# EAGLE board Project_v17b (EAGLE 5.06)
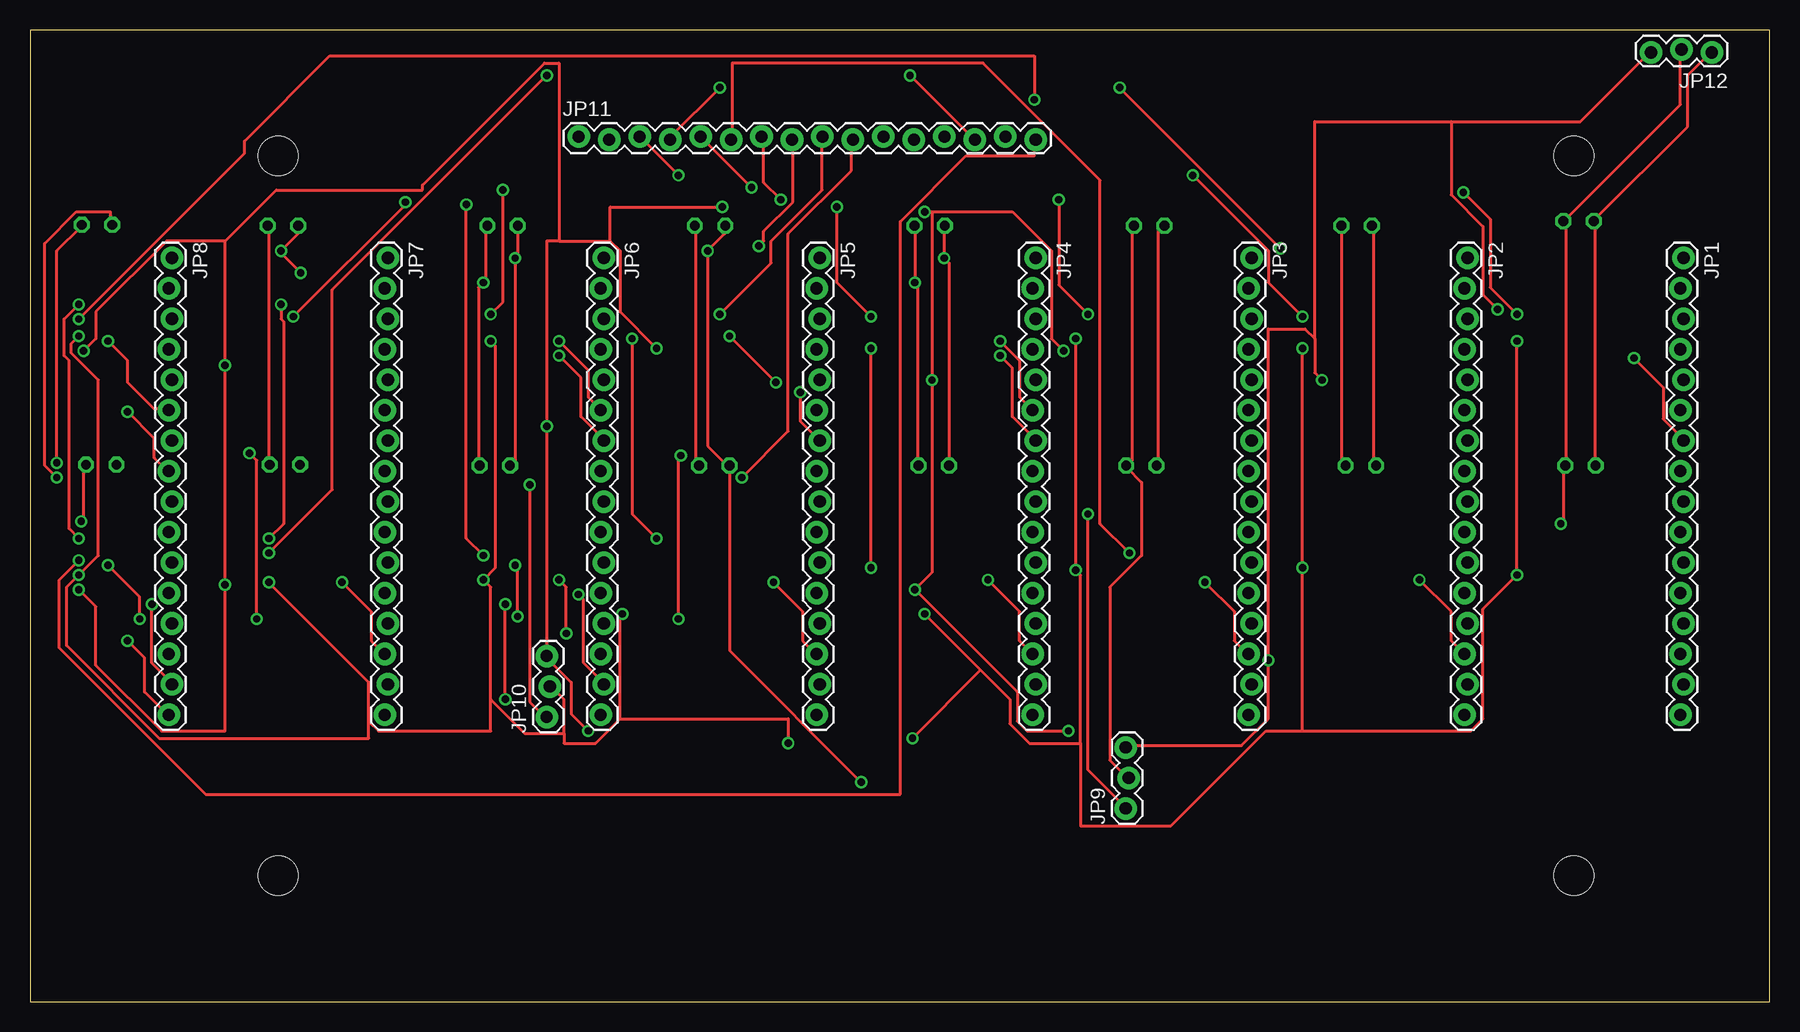
[diagram p0: board, top side]
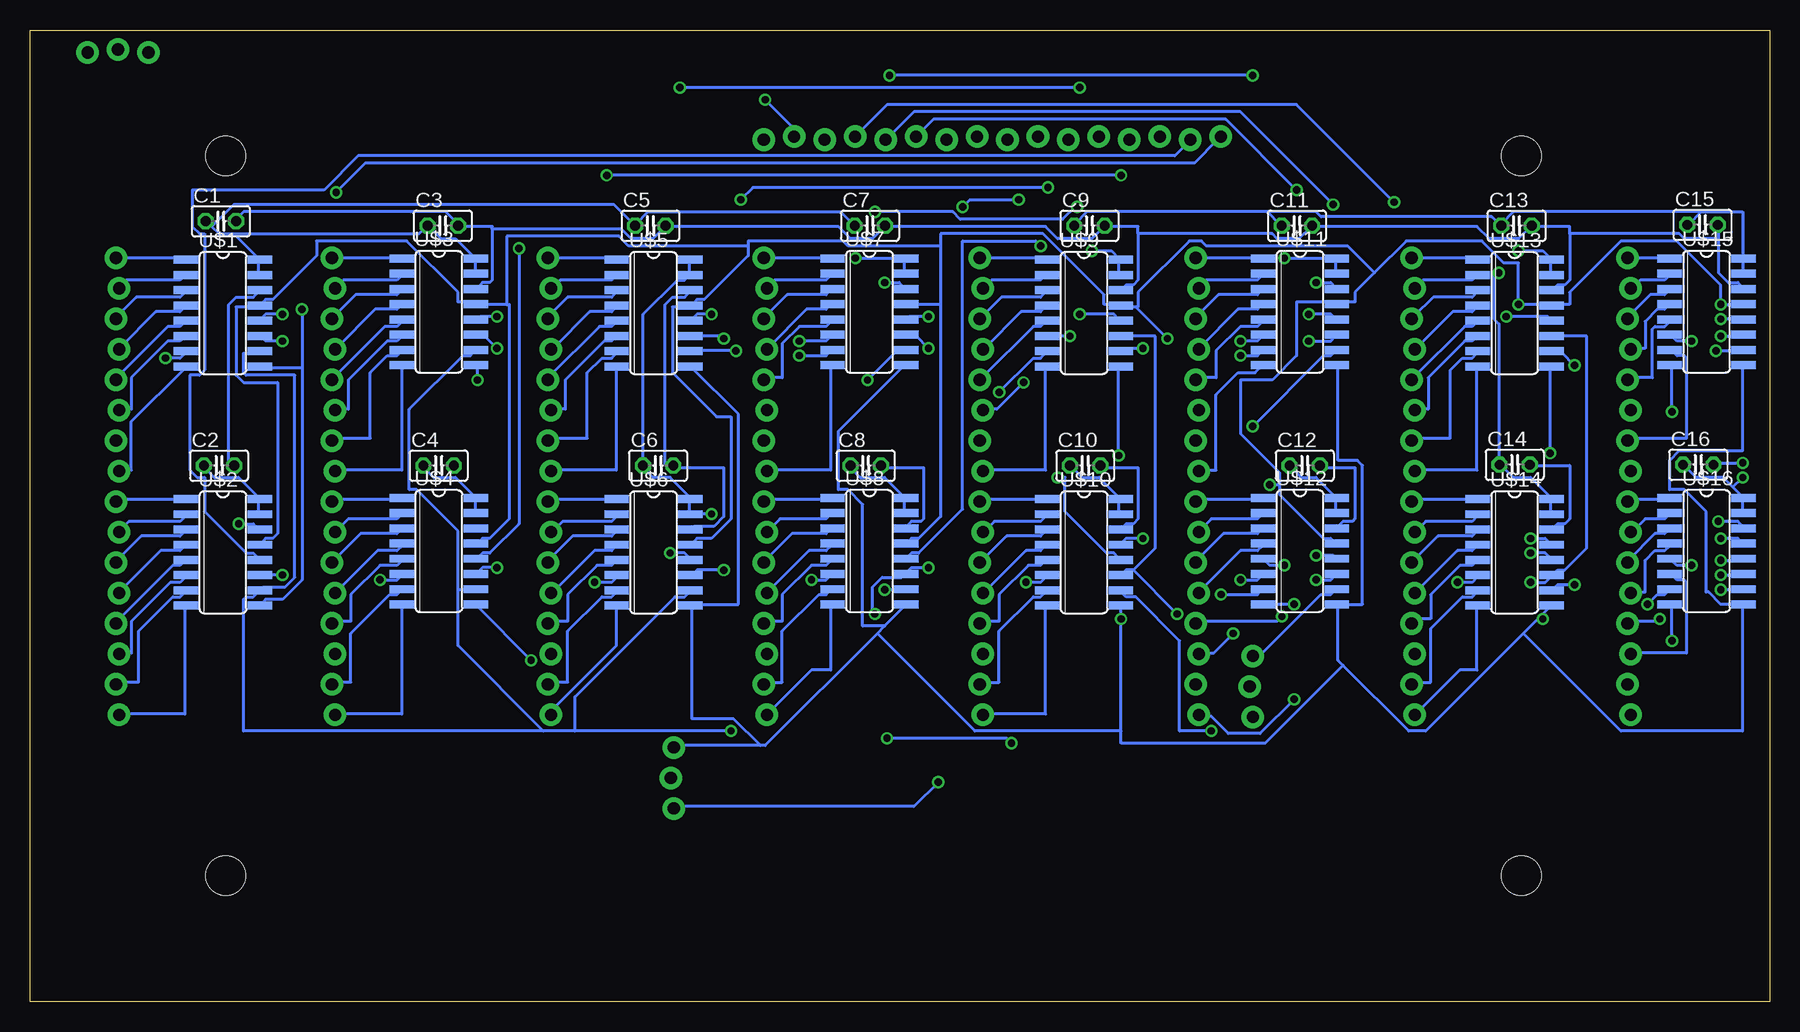
[diagram p1: board, bottom side, seen from below]

Size 145 x 81 mm. Coordinates in mm from the lower left corner, seen from the top.
Outline: 0,0 145,0 145,81 0,81 0,0
Copper layers (1*16): Top 0.035mm / dielectric 1.5mm / Bottom 0.035mm
Design rules "default": minimum track width 10mil, minimum drill 24mil, track to track 8mil, track to pad 8mil, pad to pad 8mil, via to via 8mil, smd to smd 8mil, copper to edge 40mil, drill to drill 8mil, minimum pad ring 10mil, minimum via ring 8mil, stop-mask expansion 4mil, vias tented up to drill 0mil, thermal gap 10mil

## Footprints (pad centres in the part's own frame; a part is rotated, then mirrored left to right if it is on the bottom)
C025-025X050 = drill 0.813 octagon: 1 -1.27,0; 2 1.27,0
1X16_LOCK = drill 1.016 pad 1.88 round: 1 0,0.127; 2 2.54,-0.127; 3 5.08,0.127; 4 7.62,-0.127; 5 10.16,0.127; 6 12.7,-0.127; 7 15.24,0.127; 8 17.78,-0.127; 9 20.32,0.127; 10 22.86,-0.127; 11 25.4,0.127; 12 27.94,-0.127; 13 30.48,0.127; 14 33.02,-0.127; 15 35.56,0.127; 16 38.1,-0.127
1X03_LOCK = drill 1.016 pad 1.88 round: 1 0,0.127; 2 2.54,-0.127; 3 5.08,0.127
SOIC-16 = smd 0.66 x 2.032: 1 -4.445,-3.073; 2 -3.175,-3.073; 3 -1.905,-3.073; 4 -0.635,-3.073; 5 0.635,-3.073; 6 1.905,-3.073; 7 3.175,-3.073; 8 4.445,-3.073; 9 4.445,3.073; 10 3.175,3.073; 11 1.905,3.073; 12 0.635,3.073; 13 -0.635,3.073; 14 -1.905,3.073; 15 -3.175,3.073; 16 -4.445,3.073
STAND-OFF = hole 3.302: 0,0

## Placement (x,y rotation side)
C1  [C025-025X050]  129.09,65.06 0 bottom
C2  [C025-025X050]  129.24,44.68 0 bottom
C3  [C025-025X050]  110.59,64.68 0 bottom
C4  [C025-025X050]  110.94,44.68 0 bottom
C5  [C025-025X050]  93.29,64.68 0 bottom
C6  [C025-025X050]  92.64,44.68 0 bottom
C7  [C025-025X050]  74.99,64.68 0 bottom
C8  [C025-025X050]  75.34,44.68 0 bottom
C9  [C025-025X050]  56.69,64.68 0 bottom
C10  [C025-025X050]  57.04,44.68 0 bottom
C11  [C025-025X050]  39.39,64.68 0 bottom
C12  [C025-025X050]  38.74,44.68 0 bottom
C13  [C025-025X050]  21.09,64.68 0 bottom
C14  [C025-025X050]  21.24,44.76 0 bottom
C15  [C025-025X050]  5.59,64.76 0 bottom
C16  [C025-025X050]  5.94,44.76 0 bottom
JP1  M16LOCK  [1X16_LOCK]  137.7,62 270 top
JP2  M16LOCK  [1X16_LOCK]  119.7,62 270 top
JP3  M16LOCK  [1X16_LOCK]  101.7,62 270 top
JP4  M16LOCK  [1X16_LOCK]  83.7,62 270 top
JP5  M16LOCK  [1X16_LOCK]  65.7,62 270 top
JP6  M16LOCK  [1X16_LOCK]  47.7,62 270 top
JP7  M16LOCK  [1X16_LOCK]  29.7,62 270 top
JP8  M16LOCK  [1X16_LOCK]  11.7,62 270 top
JP9  [1X03_LOCK]  91.46,16.1 90 top
JP10  [1X03_LOCK]  43.2,23.72 90 top
JP11  M16LOCK  [1X16_LOCK]  45.74,71.98 0 top
JP12  [1X03_LOCK]  140.2,79.25 180 top
U$1  MCP3208SOIC-16  [SOIC-16]  128.92,57.4 270 bottom
U$2  MCP3208SOIC-16  [SOIC-16]  128.92,37.45 270 bottom
U$3  MCP3208SOIC-16  [SOIC-16]  110.92,57.5 270 bottom
U$4  MCP3208SOIC-16  [SOIC-16]  110.92,37.55 270 bottom
U$5  MCP3208SOIC-16  [SOIC-16]  93.03,57.4 270 bottom
U$6  MCP3208SOIC-16  [SOIC-16]  93.03,37.45 270 bottom
U$7  MCP3208SOIC-16  [SOIC-16]  75.03,57.5 270 bottom
U$8  MCP3208SOIC-16  [SOIC-16]  75.03,37.55 270 bottom
U$9  MCP3208SOIC-16  [SOIC-16]  57.14,57.4 270 bottom
U$10  MCP3208SOIC-16  [SOIC-16]  57.14,37.45 270 bottom
U$11  MCP3208SOIC-16  [SOIC-16]  39.14,57.5 270 bottom
U$12  MCP3208SOIC-16  [SOIC-16]  39.14,37.55 270 bottom
U$13  MCP3208SOIC-16  [SOIC-16]  21.25,57.4 270 bottom
U$14  MCP3208SOIC-16  [SOIC-16]  21.25,37.45 270 bottom
U$15  MCP3208SOIC-16  [SOIC-16]  5.25,57.5 270 bottom
U$16  MCP3208SOIC-16  [SOIC-16]  5.25,37.55 270 bottom
U$18  [STAND-OFF]  128.7,70.5 0 top
U$19  [STAND-OFF]  128.7,10.5 0 top
U$20  [STAND-OFF]  20.7,10.5 0 top
U$21  [STAND-OFF]  20.7,70.5 0 top

## Library data of the parts
C1-C16 = resistor
JP1-JP12 U$18-U$21 = SparkFun
U$1-U$16 = MCP3208

## Nets
5V: C1.1 C2.1 C3.1 C4.1 C5.1 C6.1 C7.1 C8.1 C9.1 C10.1 C11.1 C12.1 C13.1 C14.1 C15.1 C16.1 JP9.1 JP12.1 U$1.15 U$1.16 U$2.15 U$2.16 U$3.15 U$3.16 U$4.15 U$4.16 U$5.15 U$5.16 U$6.15 U$6.16 U$7.15 U$7.16 U$8.15 U$8.16 U$9.15 U$9.16 U$10.15 U$10.16 U$11.15 U$11.16 U$12.15 U$12.16 U$13.15 U$13.16 U$14.15 U$14.16 U$15.15 U$15.16 U$16.15 U$16.16
DGND: JP9.3 JP12.3 U$1.9 U$2.9 U$3.9 U$4.9 U$5.9 U$6.9 U$7.9 U$8.9 U$9.9 U$10.9 U$11.9 U$12.9 U$13.9 U$14.9 U$15.9 U$16.9
GND: C1.2 C2.2 C3.2 C4.2 C5.2 C6.2 C7.2 C8.2 C9.2 C10.2 C11.2 C12.2 C13.2 C14.2 C15.2 C16.2 JP9.2 JP12.2 U$1.14 U$2.14 U$3.14 U$5.14 U$6.14 U$7.14 U$8.14 U$9.14 U$10.14 U$11.14 U$12.14 U$13.14 U$14.14 U$15.14 U$16.14
N$1: JP1.1 U$1.1
N$2: JP1.2 U$1.2
N$3: JP1.3 U$1.3
N$4: JP1.5 U$1.5
N$5: JP1.4 U$1.4
N$6: JP1.6 U$1.6
N$7: JP1.7 U$1.7
N$8: JP1.8 U$1.8
N$9: JP1.9 U$2.1
N$10: JP1.10 U$2.2
N$11: JP1.11 U$2.3
N$12: JP1.12 U$2.4
N$13: JP1.13 U$2.5
N$14: JP1.14 U$2.6
N$15: JP1.15 U$2.7
N$16: JP1.16 U$2.8
N$17: JP2.1 U$3.1
N$18: JP2.2 U$3.2
N$19: JP2.3 U$3.3
N$20: JP2.4 U$3.4
N$21: JP2.5 U$3.5
N$22: JP2.6 U$3.6
N$23: JP2.7 U$3.7
N$24: JP2.8 U$3.8
N$25: JP2.9 U$4.1
N$26: JP2.10 U$4.2
N$27: JP2.11 U$4.3
N$28: JP2.12 U$4.4
N$29: JP2.13 U$4.5
N$30: JP2.14 U$4.6
N$31: JP2.15 U$4.7
N$32: JP2.16 U$4.8
N$33: JP3.1 U$5.1
N$34: JP3.2 U$5.2
N$35: JP3.3 U$5.3
N$36: JP3.4 U$5.4
N$37: JP3.5 U$5.5
N$38: JP3.6 U$5.6
N$39: JP3.7 U$5.7
N$40: JP3.8 U$5.8
N$41: JP3.9 U$6.1
N$42: JP3.10 U$6.2
N$43: JP3.11 U$6.3
N$44: JP3.12 U$6.4
N$45: JP3.13 U$6.5
N$46: JP3.14 U$6.6
N$47: JP3.15 U$6.7
N$48: JP3.16 U$6.8
N$49: JP4.1 U$7.1
N$50: JP4.2 U$7.2
N$51: JP4.3 U$7.3
N$52: JP4.4 U$7.4
N$53: JP4.5 U$7.5
N$54: JP4.6 U$7.6
N$55: JP4.7 U$7.7
N$56: JP4.8 U$7.8
N$57: JP4.9 U$8.1
N$58: JP4.10 U$8.2
N$59: JP4.11 U$8.3
N$60: JP4.12 U$8.4
N$61: JP4.13 U$8.5
N$62: JP4.14 U$8.6
N$63: JP4.15 U$8.7
N$64: JP4.16 U$8.8
N$65: JP5.1 U$9.1
N$66: JP5.2 U$9.2
N$67: JP5.3 U$9.3
N$68: JP5.4 U$9.4
N$69: JP5.5 U$9.5
N$70: JP5.6 U$9.6
N$71: JP5.7 U$9.7
N$72: JP5.8 U$9.8
N$73: JP5.9 U$10.1
N$74: JP5.10 U$10.2
N$75: JP5.11 U$10.3
N$76: JP5.12 U$10.4
N$77: JP5.13 U$10.5
N$78: JP5.14 U$10.6
N$79: JP5.15 U$10.7
N$80: JP5.16 U$10.8
N$81: JP6.1 U$11.1
N$82: JP6.2 U$11.2
N$83: JP6.3 U$11.3
N$84: JP6.4 U$11.4
N$85: JP6.5 U$11.5
N$86: JP6.6 U$11.6
N$87: JP6.7 U$11.7
N$88: JP6.8 U$11.8
N$89: JP6.9 U$12.1
N$90: JP6.10 U$12.2
N$91: JP6.11 U$12.3
N$92: JP6.12 U$12.4
N$93: JP6.13 U$12.5
N$94: JP6.14 U$12.6
N$95: JP6.15 U$12.7
N$96: JP6.16 U$12.8
N$97: JP7.1 U$13.1
N$98: JP7.2 U$13.2
N$99: JP7.3 U$13.3
N$100: JP7.4 U$13.4
N$101: JP7.5 U$13.5
N$102: JP7.6 U$13.6
N$103: JP7.7 U$13.7
N$104: JP7.8 U$13.8
N$105: JP7.9 U$14.1
N$106: JP7.10 U$14.2
N$107: JP7.11 U$14.3
N$108: JP7.12 U$14.4
N$109: JP7.13 U$14.5
N$110: JP7.14 U$14.6
N$111: JP7.15 U$14.7
N$112: JP7.16 U$14.8
N$113: JP8.1 U$15.1
N$114: JP8.2 U$15.2
N$115: JP8.3 U$15.3
N$116: JP8.4 U$15.4
N$117: JP8.5 U$15.5
N$118: JP8.6 U$15.6
N$119: JP8.7 U$15.7
N$120: JP8.8 U$15.8
N$121: JP8.9 U$16.1
N$122: JP8.10 U$16.2
N$123: JP8.11 U$16.3
N$124: JP8.12 U$16.4
N$125: JP8.13 U$16.5
N$126: JP8.14 U$16.6
N$127: JP8.15 U$16.7
N$128: JP8.16 U$16.8
N$129: JP10.1 U$1.13 U$2.13 U$3.13 U$4.13 U$5.13 U$6.13 U$7.13 U$8.13 U$9.13 U$10.13 U$11.13 U$12.13 U$13.13 U$14.13 U$15.13 U$16.13
N$130: JP10.2 U$1.11 U$2.11 U$3.11 U$4.11 U$5.11 U$6.11 U$7.11 U$8.11 U$9.11 U$10.11 U$11.11 U$12.11 U$13.11 U$14.11 U$15.11 U$16.11
N$132: JP11.8 U$8.12
N$133: JP11.16 U$16.12
N$134: JP11.15 U$15.12
N$135: JP11.7 U$7.12
N$136: JP11.6 U$6.12
N$137: JP11.14 U$14.12
N$138: JP11.5 U$5.12
N$139: JP11.13 U$13.12
N$140: JP11.4 U$4.12
N$141: JP11.12 U$12.12
N$142: JP11.3 U$3.12
N$143: JP11.11 U$11.12
N$144: JP11.10 U$10.12
N$145: JP11.2 U$2.12
N$146: JP11.1 U$1.12
N$147: JP10.3 U$1.10 U$2.10 U$3.10 U$4.10 U$5.10 U$6.10 U$7.10 U$8.10 U$9.10 U$10.10 U$11.10 U$12.10 U$13.10 U$14.10 U$15.10 U$16.10
N$148: JP11.9 U$9.12

## Tracks (layer width: path | path; a pad name or v marks a point on that pad's centre or on a via)
5V  (via drill 0.61)
  Top 0.254: C13.1 22.35,64.62 22.35,64.01 v20.93,62.59 20.93,62.38 v22.55,60.76 | v2.23,43.69 1.22,44.7 1.22,63.2 3.86,65.84 6.71,65.84 6.71,64.82 C15.1 | C9.1 57.91,64.62 57.91,64.01 v56.49,62.59 56.49,46.33 58.12,44.7 C10.1 58.32,44.5 58.32,29.26 v69.29,18.29 | C11.1 40.64,64.62 40.64,62.18 v40.44,61.98 40.44,45.11 40.03,44.7 C12.1 | C7.1 76.2,64.62 v76.2,61.98 76.61,61.57 76.61,44.7 C8.1 | C5.1 94.49,64.62 94.08,64.21 94.08,44.7 C6.1 | v88.19,40.64 88.19,19.3 91.24,16.26 JP9.1 | JP12.1 140,79.05 138.18,77.22 138.18,72.95 130.45,65.23 C1.1 130.45,65.02 130.45,44.7 C2.1 | C4.1 112.17,44.7 111.96,44.91 111.96,64.62 C3.1
  Bottom 0.254: U$16.15 2.23,40.84 2.23,41.86 U$16.16 2.23,42.06 3.05,42.88 | 3.05,42.88 3.86,43.69 6.1,43.69 7.11,44.7 C16.1 | U$14.15 18.29,40.64 18.29,41.86 U$14.16 18.29,42.06 19.91,43.69 21.34,43.69 22.35,44.7 C14.1 22.55,44.91 22.55,56.49 22.96,56.9 22.96,60.76 v22.55,60.76 | U$13.15 18.29,60.76 18.29,61.77 U$13.16 18.29,61.98 18.9,62.59 v20.93,62.59 | U$15.15 2.23,60.76 2.23,61.77 U$15.16 2.23,61.98 2.23,65.84 5.69,65.84 | 5.69,65.84 6.71,64.82 C15.1 | 5.69,65.84 21.34,65.84 22.35,64.82 C13.1 22.55,64.82 23.16,65.43 37.39,65.43 37.8,65.84 41.86,65.84 | 3.05,42.88 v2.23,43.69 | U$10.15 54.25,40.64 54.25,41.86 U$10.16 54.25,42.06 55.88,43.69 57.3,43.69 58.12,44.5 C10.1 | U$9.15 54.25,60.76 54.25,61.77 U$9.16 54.25,61.98 54.86,62.59 v56.49,62.59 | U$12.15 36.17,40.84 36.17,41.86 U$12.16 36.17,42.06 37.8,43.69 39.01,43.69 39.83,44.5 C12.1 | U$11.15 36.17,60.76 36.17,61.77 U$11.16 36.17,61.98 v40.44,61.98 | 41.86,65.84 56.9,65.84 57.91,64.82 C9.1 | 41.86,65.84 40.84,64.82 C11.1 | U$7.15 72.14,60.76 72.14,61.77 U$7.16 72.14,61.98 v76.2,61.98 | U$8.15 72.14,40.84 72.14,41.86 U$8.16 72.14,42.06 73.76,43.69 75.79,43.69 76.61,44.5 C8.1 | U$5.16 90.02,61.77 90.02,60.76 U$5.15 90.02,60.55 90.42,60.15 91.03,60.15 93.88,57.3 93.88,44.7 C6.1 93.88,44.5 93.07,43.69 91.64,43.69 90.02,42.06 U$6.16 90.02,41.86 90.02,40.64 U$6.15 89.81,40.64 v88.19,40.64 | C7.1 76.4,64.82 77.42,65.84 93.47,65.84 94.49,64.82 C5.1 94.69,64.82 96.32,66.45 128.02,66.45 129.84,64.62 | U$2.15 125.98,40.64 125.98,41.86 U$2.16 125.98,42.06 127.61,43.69 129.64,43.69 130.45,44.5 C2.1 | U$4.15 107.9,40.84 107.9,41.86 U$4.16 107.9,42.06 109.53,43.69 111.35,43.69 112.17,44.5 C4.1
  Bottom 0.254: U$3.15 107.9,60.76 107.9,61.77 U$3.16 107.9,61.98 109.53,63.6 110.74,63.6 111.76,64.62 C3.1 111.96,64.62 112.57,64.01 128.02,64.01 | U$1.15 125.98,60.76 125.98,61.77 U$1.16 125.98,61.98 128.02,64.01 | 128.02,64.01 129.24,64.01 129.84,64.62 | 129.84,64.62 130.25,65.02 C1.1 | v69.29,18.29 71.32,16.26 91.24,16.26 JP9.1
DGND  (via drill 0.61)
  Top 0.254: v18.29,45.72 18.9,45.11 v18.9,31.9 | v54.25,45.52 54.05,45.31 v54.05,31.9 | JP9.3 91.44,21.34 100.99,21.34 103.23,23.57 v103.23,28.45 103.23,56.08 106.27,56.08 107.09,55.27 | v107.7,51.82 107.09,52.43 107.09,55.27 | 118.47,73.36 107.09,73.36 107.09,55.27 | 118.47,73.36 129.24,73.36 134.93,79.05 JP12.3 | v122.33,57.71 121.11,58.93 121.11,64.62 118.47,67.26 118.47,73.36
  Bottom 0.254: 20.52,30.68 28.65,22.55 30.07,22.55 35.56,28.04 | 20.52,30.68 19.1,32.11 | 19.1,32.11 18.29,32.92 U$14.9 | 35.56,28.04 35.97,28.45 35.97,32.92 U$12.9 35.97,33.12 33.93,33.12 33.93,44.7 34.34,45.11 35.97,45.11 35.97,53.03 U$11.9 | 54.05,22.55 54.05,21.54 42.06,21.54 35.56,28.04 | 54.05,22.55 v54.05,31.9 54.05,32.92 U$10.9 | 20.52,30.68 12.39,22.55 2.23,22.55 2.23,32.92 U$16.9 2.23,33.12 4.06,33.12 5.08,34.14 5.28,34.14 5.28,40.84 7.11,42.67 8.33,42.67 8.33,45.11 7.52,45.92 2.23,45.92 2.23,53.03 U$15.9 | v18.29,45.72 18.29,52.83 U$13.9 | 19.1,32.11 v18.9,31.9 | v54.25,45.52 54.25,52.83 U$9.9 | 122.33,52.83 122.33,35.15 123.95,33.53 125.37,33.53 125.78,33.12 U$2.9 | 122.33,52.83 125.78,52.83 U$1.9 | 74.37,30.68 83.72,21.34 84.12,21.34 | 74.37,30.68 73.76,31.29 | 73.76,31.29 72.14,32.92 U$8.9 | 84.12,21.34 91.24,21.34 JP9.3 | 84.12,21.34 86.36,23.57 89.81,23.57 89.81,32.92 U$6.9 89.81,33.12 85.95,33.12 85.95,48.97 89.81,52.83 U$5.9 | v103.23,28.45 107.7,32.92 U$4.9 | 73.76,31.29 75.59,31.29 75.59,41.45 76.81,42.67 77.62,42.67 77.62,47.55 72.14,53.03 U$7.9 | v107.7,51.82 107.7,53.03 U$3.9 | v122.33,57.71 122.33,52.83 | 54.05,22.55 66.24,22.55 74.37,30.68
GND  (via drill 0.61)
  Top 0.254: v4.27,40.03 4.47,40.23 4.47,44.7 C16.2 | C14.2 19.91,44.91 19.91,64.62 C13.2 | v2.23,44.91 2.23,62.59 4.27,64.62 C15.2 | C11.2 38,64.62 38,60.15 v37.8,59.94 37.39,59.54 37.39,44.7 C12.2 | C10.2 55.68,44.7 55.47,44.91 55.47,64.62 C9.2 | v127.61,39.83 127.81,40.03 127.81,44.5 C2.2 128.02,44.7 128.02,65.02 C1.2 128.02,65.23 137.57,74.78 137.57,79.25 JP12.2 | JP9.2 91.44,18.69 90.02,20.12 90.02,34.54 92.66,37.19 92.66,43.28 91.44,44.5 C6.2 91.44,44.7 91.85,45.11 91.85,64.62 C5.2 | C7.2 73.76,64.62 v73.76,59.94 73.97,59.74 73.97,44.7 C8.2 | C4.2 109.53,44.7 109.32,44.91 109.32,64.62 C3.2
  Bottom 0.254: v4.27,40.03 2.64,40.03 2.23,39.62 U$16.14 | U$14.14 18.09,39.42 17.68,39.83 17.07,39.83 16.66,40.23 16.66,44.7 19.91,44.7 C14.2 | 16.66,64.01 16.66,64.62 19.71,64.62 C13.2 19.91,64.62 20.93,63.6 23.37,63.6 24.38,64.62 38,64.62 C11.2 38.2,64.62 39.22,63.6 41.05,63.6 41.45,64.01 52.63,64.01 | 16.66,64.01 16.66,60.15 17.07,59.74 17.68,59.74 18.09,59.33 U$13.14 | 4.27,63.6 4.27,64.62 C15.2 | 4.27,63.6 4.27,60.76 3.45,59.94 2.64,59.94 2.23,59.54 U$15.14 | 16.66,64.01 7.52,64.01 7.11,63.6 4.27,63.6 | v2.23,44.91 4.47,44.91 C16.2 | U$10.14 54.05,39.42 53.65,39.83 53.03,39.83 52.63,40.23 52.63,44.5 55.68,44.5 C10.2 | 52.63,64.01 52.63,64.62 55.27,64.62 C9.2 55.47,64.62 56.49,63.6 59.33,63.6 60.35,64.62 73.56,64.62 C7.2 73.76,64.62 74.78,63.6 76.61,63.6 77.62,64.62 91.85,64.62 C5.2 92.05,64.62 93.07,63.6 94.89,63.6 95.71,64.41 106.48,64.41 | 52.63,64.01 52.63,60.15 53.03,59.74 53.65,59.74 54.05,59.33 U$9.14 | U$12.14 35.97,39.62 35.56,40.03 34.75,40.03 34.54,40.23 34.54,44.5 37.39,44.5 C12.2 | v37.8,59.94 36.58,59.94 36.17,59.54 U$11.14 | v127.61,39.83 126.39,39.83 125.98,39.42 U$2.14 | U$1.14 125.98,59.13 126.39,58.73 127.81,58.73 128.42,58.12 128.42,44.7 128.02,44.7 C2.2 | U$6.14 89.81,39.42 89.61,39.62 87.99,39.62 87.17,40.44 87.17,44.5 91.24,44.5 C6.2 91.44,44.7 92.05,44.7 92.05,58.12 91.44,58.73 90.42,58.73 90.02,59.13 U$5.14 | v73.76,59.94 72.54,59.94 72.14,59.54 U$7.14 | U$8.14 71.93,39.62 71.53,40.03 70.71,40.03 70.51,40.23 70.51,44.5 73.97,44.5 C8.2 | 106.48,64.41 106.48,64.62 109.12,64.62 C3.2 109.32,64.82 110.34,65.84 127.2,65.84 127.81,65.23 C1.2
  Bottom 0.254: 106.48,64.41 106.48,60.15 106.68,59.94 107.29,59.94 107.7,59.54 U$3.14
N$1
  Bottom 0.254: U$1.1 132.08,61.98 137.77,61.98 JP1.1
N$2
  Bottom 0.254: U$1.2 132.08,60.55 132.49,60.15 136.96,60.15 137.57,59.54 JP1.2
N$3
  Bottom 0.254: U$1.3 132.08,59.13 132.49,58.73 136.14,58.73 137.77,57.1 JP1.3
N$4
  Bottom 0.254: U$1.5 132.08,56.69 132.49,56.29 133.5,56.29 137.77,52.02 JP1.5
N$5
  Bottom 0.254: U$1.4 132.08,57.91 132.49,57.51 134.52,57.51 137.57,54.46 JP1.4
N$6
  Bottom 0.254: U$1.6 132.08,55.47 132.49,55.07 133.5,55.07 136.55,52.02 136.55,49.38 137.57,49.38 JP1.6
N$7  (via drill 0.61)
  Top 0.254: v133.71,53.65 136.14,51.21 136.14,48.56 137.77,46.94 JP1.7
  Bottom 0.254: v133.71,53.65 132.49,53.65 132.08,54.05 U$1.7
N$8
  Bottom 0.254: U$1.8 132.08,52.83 136.55,48.36 136.55,44.3 137.57,44.3 JP1.8
N$9
  Bottom 0.254: U$2.1 132.08,41.86 137.77,41.86 JP1.9
N$10
  Bottom 0.254: U$2.2 132.08,40.44 132.49,40.03 136.75,40.03 137.57,39.22 JP1.10
N$11
  Bottom 0.254: U$2.3 132.08,39.22 132.49,38.81 135.74,38.81 137.77,36.78 JP1.11
N$12
  Bottom 0.254: U$2.4 132.49,37.59 134.11,37.59 137.57,34.14 JP1.12
N$13
  Bottom 0.254: U$2.5 132.08,36.78 132.49,36.37 133.1,36.37 137.77,31.7 JP1.13
N$14
  Bottom 0.254: U$2.6 132.08,35.36 132.49,34.95 133.3,34.95 136.55,31.7 136.55,29.06 137.57,29.06 JP1.14
N$15
  Bottom 0.254: U$2.7 132.08,34.14 132.49,33.73 133.1,33.73 135.94,30.89 135.94,26.62 137.77,26.62 JP1.15
N$16
  Bottom 0.254: U$2.8 132.08,32.92 132.08,23.98 137.57,23.98 JP1.16
N$17
  Bottom 0.254: U$3.1 114,61.98 119.69,61.98 JP2.1
N$18
  Bottom 0.254: U$3.2 114,60.55 114.4,60.15 118.87,60.15 119.48,59.54 JP2.2
N$19
  Bottom 0.254: U$3.3 114,59.33 114.4,58.93 117.86,58.93 119.69,57.1 JP2.3
N$20
  Bottom 0.254: U$3.4 114,58.12 114.4,57.71 116.23,57.71 119.48,54.46 JP2.4
N$21
  Bottom 0.254: U$3.5 114,56.69 114.4,56.29 115.42,56.29 119.69,52.02 JP2.5
N$22
  Bottom 0.254: U$3.6 114,55.47 114.4,55.07 115.21,55.07 118.47,51.82 118.47,49.38 119.48,49.38 JP2.6
N$23
  Bottom 0.254: U$3.7 114,54.25 114.4,53.85 115.21,53.85 116.64,52.43 116.64,46.94 119.69,46.94 JP2.7
N$24
  Bottom 0.254: U$3.8 114,53.03 114,44.3 119.48,44.3 JP2.8
N$25
  Bottom 0.254: U$4.1 114,41.86 119.69,41.86 JP2.9
N$26
  Bottom 0.254: U$4.2 114,40.64 114.4,40.23 118.47,40.23 119.48,39.22 JP2.10
N$27
  Bottom 0.254: U$4.3 114,39.42 114.4,39.01 117.45,39.01 119.69,36.78 JP2.11
N$28
  Bottom 0.254: U$4.4 114,38 114.4,37.59 116.03,37.59 119.48,34.14 JP2.12
N$29
  Bottom 0.254: U$4.5 114,36.78 114.4,36.37 115.82,36.37 118.26,33.93 118.26,31.7 119.69,31.7 JP2.13
N$30  (via drill 0.61)
  Top 0.254: v115.82,35.15 118.47,32.51 118.47,30.07 119.48,29.06 JP2.14
  Bottom 0.254: v115.82,35.15 114.4,35.15 114,35.56 U$4.6
N$31
  Bottom 0.254: U$4.7 114,34.34 114.4,33.93 115.01,33.93 118.26,30.68 118.26,26.62 119.69,26.62 JP2.15
N$32
  Bottom 0.254: U$4.8 114,32.92 114,23.98 119.48,23.98 JP2.16
N$33
  Bottom 0.254: U$5.1 96.11,61.98 101.8,61.98 JP3.1
N$34
  Bottom 0.254: U$5.2 96.11,60.55 96.52,60.15 100.79,60.15 101.4,59.54 JP3.2
N$35
  Bottom 0.254: U$5.3 96.11,59.13 96.52,58.73 100.18,58.73 101.8,57.1 JP3.3
N$36
  Bottom 0.254: U$5.4 96.11,57.91 96.52,57.51 98.35,57.51 101.4,54.46 JP3.4
N$37
  Bottom 0.254: U$5.5 96.11,56.69 96.52,56.29 97.54,56.29 101.8,52.02 JP3.5
N$38
  Bottom 0.254: U$5.6 96.11,55.47 96.52,55.07 97.13,55.07 100.38,51.82 100.38,49.38 101.4,49.38 JP3.6
N$39
  Bottom 0.254: U$5.7 96.11,54.05 96.52,53.65 97.33,53.65 98.55,52.43 98.55,46.94 101.8,46.94 JP3.7
N$40
  Bottom 0.254: U$5.8 96.11,52.83 96.11,44.3 101.4,44.3 JP3.8
N$41
  Bottom 0.254: U$6.1 96.11,41.86 101.8,41.86 JP3.9
N$42
  Bottom 0.254: U$6.2 96.11,40.44 96.52,40.03 100.58,40.03 101.4,39.22 JP3.10
N$43
  Bottom 0.254: U$6.3 96.11,39.22 96.52,38.81 99.77,38.81 101.8,36.78 JP3.11
N$44
  Bottom 0.254: U$6.4 96.11,38 96.52,37.59 97.94,37.59 101.4,34.14 JP3.12
N$45
  Bottom 0.254: U$6.5 96.11,36.78 96.52,36.37 97.74,36.37 100.18,33.93 100.18,31.7 101.8,31.7 JP3.13
N$46  (via drill 0.61)
  Top 0.254: v97.94,34.95 100.38,32.51 100.38,30.07 101.4,29.06 JP3.14
  Bottom 0.254: v97.94,34.95 96.52,34.95 96.11,35.36 U$6.6
N$47
  Bottom 0.254: U$6.7 96.11,34.14 96.52,33.73 97.33,33.73 100.18,30.89 100.18,26.62 101.8,26.62 JP3.15
N$48
  Bottom 0.254: U$6.8 96.11,32.92 96.11,29.67 101.4,24.38 101.4,23.98 JP3.16
N$49
  Bottom 0.254: U$7.1 78.23,61.98 83.72,61.98 JP4.1
N$50
  Bottom 0.254: U$7.2 78.23,60.55 78.64,60.15 82.91,60.15 83.52,59.54 JP4.2
N$51
  Bottom 0.254: U$7.3 78.23,59.33 78.64,58.93 81.89,58.93 83.72,57.1 JP4.3
N$52
  Bottom 0.254: U$7.4 78.23,58.12 78.64,57.71 80.26,57.71 83.52,54.46 JP4.4
N$53
  Bottom 0.254: U$7.5 78.23,56.69 78.64,56.29 80.87,56.29 82.3,54.86 82.3,52.02 83.72,52.02 JP4.5
N$54  (via drill 0.61)
  Top 0.254: v80.87,55.07 82.5,53.44 82.5,50.39 83.52,49.38 JP4.6
  Bottom 0.254: v80.87,55.07 78.64,55.07 78.23,55.47 U$7.6
N$55  (via drill 0.61)
  Top 0.254: v80.87,53.85 81.89,52.83 81.89,48.77 83.72,46.94 JP4.7
  Bottom 0.254: v80.87,53.85 78.64,53.85 78.23,54.25 U$7.7
N$56
  Bottom 0.254: U$7.8 78.23,53.03 78.23,44.3 83.52,44.3 JP4.8
N$57
  Bottom 0.254: U$8.1 78.23,41.86 83.72,41.86 JP4.9
N$58
  Bottom 0.254: U$8.2 78.23,40.64 78.64,40.23 82.5,40.23 83.52,39.22 JP4.10
N$59
  Bottom 0.254: U$8.3 78.23,39.42 78.64,39.01 81.48,39.01 83.72,36.78 JP4.11
N$60
  Bottom 0.254: U$8.4 78.23,38 78.64,37.59 80.06,37.59 83.52,34.14 JP4.12
N$61
  Bottom 0.254: U$8.5 78.23,36.78 78.64,36.37 79.86,36.37 82.3,33.93 82.3,31.7 83.72,31.7 JP4.13
N$62  (via drill 0.61)
  Top 0.254: v79.86,35.15 82.5,32.51 82.5,30.07 83.52,29.06 JP4.14
  Bottom 0.254: v79.86,35.15 78.64,35.15 78.23,35.56 U$8.6
N$63
  Bottom 0.254: U$8.7 78.23,34.34 78.64,33.93 79.25,33.93 82.3,30.89 82.3,26.62 83.72,26.62 JP4.15
N$64
  Bottom 0.254: U$8.8 78.23,32.92 78.23,27.64 79.86,27.64 83.52,23.98 JP4.16
N$65
  Bottom 0.254: U$9.1 60.35,61.98 65.63,61.98 JP5.1
N$66
  Bottom 0.254: U$9.2 60.35,60.55 60.76,60.15 64.82,60.15 65.43,59.54 JP5.2
N$67
  Bottom 0.254: U$9.3 60.35,59.13 60.76,58.73 64.01,58.73 65.63,57.1 JP5.3
N$68
  Bottom 0.254: U$9.4 60.35,57.91 60.76,57.51 62.38,57.51 65.43,54.46 JP5.4
N$69
  Bottom 0.254: U$9.5 60.35,56.69 60.76,56.29 61.37,56.29 65.63,52.02 JP5.5
N$70  (via drill 0.61)
  Top 0.254: v58.32,55.47 v62.18,51.61
  Bottom 0.254: v58.32,55.47 60.15,55.47 U$9.6 | v62.18,51.61 64.41,49.38 65.43,49.38 JP5.6
N$71  (via drill 0.61)
  Top 0.254: v64.21,50.8 64.21,48.36 65.63,46.94 JP5.7
  Bottom 0.254: v64.21,50.8 61.37,53.65 60.76,53.65 60.35,54.05 U$9.7
N$72
  Bottom 0.254: U$9.8 60.35,52.83 60.35,44.3 65.43,44.3 JP5.8
N$73
  Bottom 0.254: U$10.1 60.35,41.86 65.63,41.86 JP5.9
N$74
  Bottom 0.254: U$10.2 60.35,40.44 60.76,40.03 64.62,40.03 65.43,39.22 JP5.10
N$75
  Bottom 0.254: U$10.3 60.35,39.22 60.76,38.81 63.6,38.81 65.63,36.78 JP5.11
N$76
  Bottom 0.254: U$10.4 60.35,38 60.76,37.59 61.98,37.59 65.43,34.14 JP5.12
N$77
  Bottom 0.254: U$10.5 60.35,36.78 60.76,36.37 61.77,36.37 64.21,33.93 64.21,31.7 65.63,31.7 JP5.13
N$78  (via drill 0.61)
  Top 0.254: v61.98,34.95 64.41,32.51 64.41,30.07 65.43,29.06 JP5.14
  Bottom 0.254: v61.98,34.95 60.76,34.95 60.35,35.36 U$10.6
N$79
  Bottom 0.254: U$10.7 60.35,34.14 60.76,33.73 61.37,33.73 64.21,30.89 64.21,26.62 65.63,26.62 JP5.15
N$80
  Bottom 0.254: U$10.8 60.35,32.92 60.35,23.98 65.43,23.98 JP5.16
N$81
  Bottom 0.254: U$11.1 42.27,61.98 47.75,61.98 JP6.1
N$82
  Bottom 0.254: U$11.2 42.27,60.55 42.67,60.15 46.94,60.15 47.55,59.54 JP6.2
N$83
  Bottom 0.254: U$11.3 42.27,59.33 42.67,58.93 45.92,58.93 47.75,57.1 JP6.3
N$84
  Bottom 0.254: U$11.4 42.27,58.12 42.67,57.71 44.3,57.71 47.55,54.46 JP6.4
N$85
  Bottom 0.254: U$11.5 42.27,56.69 42.67,56.29 44.09,56.29 46.13,54.25 46.13,52.02 47.75,52.02 JP6.5
N$86  (via drill 0.61)
  Top 0.254: v44.09,55.07 46.53,52.63 46.53,50.39 47.55,49.38 JP6.6
  Bottom 0.254: v44.09,55.07 42.67,55.07 42.27,55.47 U$11.6
N$87  (via drill 0.61)
  Top 0.254: v44.09,53.85 45.92,52.02 45.92,48.77 47.75,46.94 JP6.7
  Bottom 0.254: v44.09,53.85 42.67,53.85 42.27,54.25 U$11.7
N$88
  Bottom 0.254: U$11.8 42.27,53.03 42.88,52.43 44.3,52.43 46.13,50.6 46.13,44.3 47.55,44.3 JP6.8
N$89
  Bottom 0.254: U$12.1 42.27,41.86 47.75,41.86 JP6.9
N$90
  Bottom 0.254: U$12.2 42.27,40.64 42.67,40.23 46.53,40.23 47.55,39.22 JP6.10
N$91
  Bottom 0.254: U$12.3 42.27,39.42 42.67,39.01 45.52,39.01 47.75,36.78 JP6.11
N$92
  Bottom 0.254: U$12.4 42.27,38 42.67,37.59 44.09,37.59 47.55,34.14 JP6.12
N$93  (via drill 0.61)
  Top 0.254: v40.44,36.37 40.64,36.17 v40.64,32.11
  Bottom 0.254: v40.44,36.37 41.66,36.37 42.06,36.78 U$12.5 | v40.64,32.11 41.05,31.7 47.75,31.7 JP6.13
N$94  (via drill 0.61)
  Top 0.254: v44.09,35.15 44.7,34.54 v44.7,30.68
  Bottom 0.254: v44.09,35.15 42.67,35.15 42.27,35.56 U$12.6 | v44.7,30.68 46.33,29.06 47.55,29.06 JP6.14
N$95  (via drill 0.61)
  Top 0.254: v45.72,33.93 46.13,33.53 46.13,28.25 47.75,26.62 JP6.15
  Bottom 0.254: v45.72,33.93 42.67,33.93 42.27,34.34 U$12.7
N$96  (via drill 0.61)
  Top 0.254: v39.62,25.2 v39.62,33.12
  Bottom 0.254: v39.62,33.12 42.06,33.12 U$12.8 | v39.62,25.2 42.47,22.35 45.11,22.35 46.53,23.77 47.55,23.77 JP6.16
N$97
  Bottom 0.254: U$13.1 24.38,61.98 29.67,61.98 JP7.1
N$98
  Bottom 0.254: U$13.2 24.38,60.55 24.79,60.15 28.85,60.15 29.46,59.54 JP7.2
N$99
  Bottom 0.254: U$13.3 24.38,59.13 24.79,58.73 28.04,58.73 29.67,57.1 JP7.3
N$100
  Bottom 0.254: U$13.4 24.38,57.91 24.79,57.51 26.42,57.51 29.46,54.46 JP7.4
N$101
  Bottom 0.254: U$13.5 24.38,56.69 24.79,56.29 25.4,56.29 29.67,52.02 JP7.5
N$102
  Bottom 0.254: U$13.6 24.38,55.47 24.79,55.07 25.4,55.07 28.45,52.02 28.45,49.38 29.46,49.38 JP7.6
N$103
  Bottom 0.254: U$13.7 24.38,54.05 24.79,53.65 25.6,53.65 26.62,52.63 26.62,46.94 29.67,46.94 JP7.7
N$104
  Bottom 0.254: U$13.8 24.38,52.83 24.38,44.3 29.46,44.3 JP7.8
N$105
  Bottom 0.254: U$14.1 24.38,41.86 29.67,41.86 JP7.9
N$106
  Bottom 0.254: U$14.2 24.38,40.44 24.79,40.03 28.65,40.03 29.46,39.22 JP7.10
N$107
  Bottom 0.254: U$14.3 24.38,39.22 24.79,38.81 27.64,38.81 29.67,36.78 JP7.11
N$108
  Bottom 0.254: U$14.4 24.38,38 24.79,37.59 26.01,37.59 29.46,34.14 JP7.12
N$109
  Bottom 0.254: U$14.5 24.38,36.78 24.79,36.37 25.81,36.37 28.25,33.93 28.25,31.9 29.46,31.9 29.67,31.7 JP7.13
N$110  (via drill 0.61)
  Top 0.254: v26.01,34.95 28.45,32.51 28.45,30.07 29.46,29.06 JP7.14
  Bottom 0.254: v26.01,34.95 24.79,34.95 24.38,35.36 U$14.6
N$111
  Bottom 0.254: U$14.7 24.38,34.14 24.79,33.73 25.6,33.73 28.25,31.09 28.25,26.62 29.67,26.62 JP7.15
N$112
  Bottom 0.254: U$14.8 24.38,32.92 24.38,27.64 25.81,27.64 29.46,23.98 JP7.16
N$113
  Bottom 0.254: U$15.1 8.33,61.98 11.79,61.98 JP8.1
N$114
  Bottom 0.254: U$15.2 8.33,60.55 8.74,60.15 10.77,60.15 11.38,59.54 JP8.2
N$115
  Bottom 0.254: U$15.3 8.33,59.33 8.74,58.93 9.96,58.93 11.79,57.1 JP8.3
N$116
  Bottom 0.254: U$15.4 8.33,58.12 8.74,57.71 9.35,57.71 10.36,56.69 10.36,54.46 11.38,54.46 JP8.4
N$117
  Bottom 0.254: U$15.5 8.33,56.69 8.74,56.29 9.55,56.29 9.75,56.08 9.75,52.02 11.79,52.02 JP8.5
N$118  (via drill 0.61)
  Top 0.254: v6.5,55.07 8.13,53.44 8.13,51.61 10.36,49.38 11.38,49.38 JP8.6
  Bottom 0.254: v6.5,55.07 7.72,55.07 8.13,55.47 U$15.6
N$119
  Bottom 0.254: U$15.7 8.13,54.25 7.72,53.85 7.11,53.85 6.91,53.65 6.91,46.94 11.79,46.94 JP8.7
N$120  (via drill 0.61)
  Top 0.254: v8.13,49.17 10.36,46.94 10.36,45.31 11.38,44.3 JP8.8
  Bottom 0.254: v8.13,49.17 8.13,53.03 U$15.8
N$121
  Bottom 0.254: U$16.1 8.33,41.86 11.79,41.86 JP8.9
N$122
  Bottom 0.254: U$16.2 8.33,40.64 8.74,40.23 10.36,40.23 11.38,39.22 JP8.10
N$123
  Bottom 0.254: U$16.3 8.33,39.42 8.74,39.01 9.55,39.01 11.79,36.78 JP8.11
N$124
  Bottom 0.254: U$16.4 8.33,38 8.74,37.59 9.55,37.59 10.36,36.78 10.36,34.14 11.38,34.14 JP8.12
N$125  (via drill 0.61)
  Top 0.254: v6.5,36.37 9.14,33.73 v9.14,31.9
  Bottom 0.254: v6.5,36.37 7.72,36.37 8.13,36.78 U$16.5 | v9.14,31.9 9.35,31.7 11.79,31.7 JP8.13
N$126
  Bottom 0.254: U$16.6 8.13,35.56 7.72,35.15 7.11,35.15 6.91,34.95 6.91,29.06 11.38,29.06 JP8.14
N$127  (via drill 0.61)
  Top 0.254: v10.16,33.12 10.16,28.25 11.79,26.62 JP8.15
  Bottom 0.254: v10.16,33.12 9.35,33.93 8.74,33.93 8.33,34.34 U$16.7
N$128  (via drill 0.61)
  Top 0.254: v8.13,30.07 9.55,28.65 9.55,25.81 11.38,23.98 JP8.16
  Bottom 0.254: v8.13,30.07 8.13,32.92 U$16.8
N$129  (via drill 0.61)
  Top 0.254: v4.06,38.61 3.25,39.42 3.25,53.44 2.85,53.85 2.85,56.9 v4.06,58.12 | v19.91,38.61 21.13,39.83 21.13,56.69 20.93,56.9 v20.93,58.12 | v41.66,43.08 41.66,24.99 42.88,23.77 JP10.1 | v52.22,38.61 50.19,40.64 v50.19,55.27
  Bottom 0.254: v4.06,38.61 2.64,38.61 2.23,38.2 U$16.13 | U$15.13 2.23,58.12 v4.06,58.12 4.06,59.74 7.72,63.4 12.39,63.4 16.66,59.13 16.66,58.12 18.09,58.12 U$13.13 18.29,58.12 v20.93,58.12 20.93,61.57 22.15,61.57 23.98,63.4 30.28,63.4 32.92,60.76 | v19.91,38.61 18.69,38.61 18.29,38.2 U$14.13 | 40.84,43.08 40.84,44.09 44.09,47.35 44.09,51.82 41.45,51.82 39.42,53.85 39.42,58.32 36.17,58.32 U$11.13 35.97,58.32 34.54,58.32 34.54,59.13 32.92,60.76 | 40.84,43.08 40.84,42.27 37.19,38.61 36.58,38.61 36.17,38.2 U$12.13 | 40.84,43.08 v41.66,43.08 | U$2.13 125.78,38.2 125.37,38.61 124.77,38.61 124.36,39.01 124.36,51.61 127.2,51.61 127.81,52.22 127.81,57.91 125.98,57.91 U$1.13 125.78,58.12 125.37,58.52 124.77,58.52 121.11,62.18 121.11,63.4 113.59,63.4 109.32,59.13 109.32,58.32 107.9,58.32 U$3.13 107.7,58.12 105.26,58.12 | 105.26,58.12 105.05,58.12 105.05,40.23 106.68,38.61 107.29,38.61 107.7,38.2 U$4.13 | U$6.13 89.81,38.2 89.41,38.61 88.19,38.61 86.56,40.23 86.56,48.77 87.78,48.77 91.44,52.43 91.44,57.91 90.02,57.91 U$5.13 89.81,58.12 89.41,58.52 88.8,58.52 85.14,62.18 85.14,62.99 | 69.09,58.12 69.09,40.44 70.92,38.61 71.53,38.61 71.93,38.2 U$8.13 | 69.09,58.12 71.93,58.12 U$7.13 | v52.22,38.61 53.65,38.61 54.05,38.2 U$10.13 | 52.83,57.91 v50.19,55.27 | 52.83,57.91 54.05,57.91 U$9.13 54.25,58.12 55.47,58.12 55.47,58.93 60.55,64.01 69.09,64.01 69.09,62.99 | 69.09,62.99 69.09,58.12 | 85.14,62.99 85.14,63.4 77.22,63.4 76.81,62.99 69.09,62.99 | 105.26,58.12 105.26,63.8 95.91,63.8 95.1,62.99 85.14,62.99 | 32.92,60.76 35.15,62.99 46.94,62.99 47.35,63.4 48.36,63.4 52.63,59.13 52.63,57.91 52.83,57.91
N$130  (via drill 0.61)
  Top 0.254: v4.06,55.47 3.45,54.86 3.45,54.05 5.69,51.82 5.69,37.19 v4.06,35.56 3.05,34.54 3.05,29.67 10.77,21.95 28.25,21.95 28.25,23.37 | 38.41,25.2 38.41,34.54 v37.8,35.15 38.81,36.17 38.81,54.66 v38.41,55.07 | 38.41,25.2 41.25,22.35 44.5,22.35 | 44.5,22.35 44.5,25.2 43.48,26.21 JP10.2 | v49.38,32.31 49.17,32.11 49.17,23.57 | 49.17,23.57 47.14,21.54 44.5,21.54 44.5,22.35 | v19.91,34.95 28.25,26.62 28.25,23.37 | 28.25,23.37 29.06,22.55 38.41,22.55 38.41,25.2 | v106.07,54.46 v106.07,36.17 106.07,22.55 | 106.07,22.55 120.09,22.55 121.11,23.57 121.11,32.72 v123.95,35.56 v123.95,55.07 | v70.1,36.17 v70.1,54.46 | v87.17,55.27 v87.17,35.97 87.58,35.56 87.58,21.54 | 79.25,27.64 81.69,25.2 81.69,23.16 83.31,21.54 87.58,21.54 | 79.25,27.64 v74.57,32.31 | 106.07,22.55 103.02,22.55 95.1,14.63 87.58,14.63 87.58,21.54 | 49.17,23.57 63.2,23.57 v63.2,21.54 | v73.56,21.95 79.25,27.64
  Bottom 0.254: v4.06,35.56 2.23,35.56 U$16.11 | v4.06,55.47 2.23,55.47 U$15.11 | U$13.11 18.09,55.47 15.24,55.47 15.24,37.8 17.07,35.97 17.68,35.97 18.09,35.56 U$14.11 18.29,35.36 18.69,34.95 v19.91,34.95 | 53.03,35.97 53.65,35.97 54.05,35.56 U$10.11 | 53.03,35.97 51.21,37.8 51.21,55.47 54.05,55.47 U$9.11 | v37.8,35.15 36.58,35.15 36.17,35.56 U$12.11 | v38.41,55.07 36.58,55.07 36.17,55.47 U$11.11 | v49.38,32.31 53.03,35.97 | v106.07,36.17 107.29,36.17 107.7,35.76 U$4.11 | v106.07,54.46 107.09,55.47 107.7,55.47 U$3.11 | v123.95,35.56 125.78,35.56 U$2.11 | v123.95,55.07 125.37,55.07 125.78,55.47 U$1.11 | v70.1,36.17 71.53,36.17 71.93,35.76 U$8.11 72.14,35.56 72.34,35.36 73.97,35.36 74.78,34.54 74.78,32.31 v74.57,32.31 | v70.1,54.46 71.12,55.47 71.93,55.47 U$7.11 | v87.17,35.97 89.41,35.97 89.81,35.56 U$6.11 | v87.17,55.27 87.38,55.47 89.81,55.47 U$5.11 | v63.2,21.54 63.6,21.95 v73.56,21.95
N$132  (via drill 0.61)
  Top 0.254: v60.76,62.99 61.16,63.4 61.16,64.21 63.6,66.65 63.6,71.73 JP11.8
  Bottom 0.254: v60.76,62.99 61.16,63.4 67.26,63.4 67.26,41.05 70.92,37.39 71.53,37.39 71.93,36.98 U$8.12
N$133  (via drill 0.61)
  Top 0.254: v4.06,36.78 2.44,35.15 2.44,29.46 14.63,17.27 72.54,17.27 72.54,65.02 78.03,70.51 83.72,70.51 83.72,71.73 JP11.16
  Bottom 0.254: v4.06,36.78 2.23,36.78 U$16.12
N$134  (via drill 0.61)
  Top 0.254: v4.06,56.9 17.88,70.71 17.88,71.73 24.99,78.84 83.72,78.84 v83.72,75.18
  Bottom 0.254: v4.06,56.9 2.23,56.9 U$15.12 | v83.72,75.18 81.48,72.95 81.48,72.14 JP11.15
N$135  (via drill 0.61)
  Top 0.254: v70.1,57.1 67.26,59.94 v67.26,66.24 | v62.59,66.85 61.16,68.28 61.16,71.93 JP11.7
  Bottom 0.254: v70.1,57.1 71.73,57.1 71.93,56.9 U$7.12 | v67.26,66.24 66.65,66.85 v62.59,66.85
N$136  (via drill 0.61)
  Top 0.254: v91.64,37.39 89.2,39.83 89.2,68.48 79.45,78.23 58.52,78.23 58.52,71.93 JP11.6
  Bottom 0.254: v91.64,37.39 90.42,37.39 90.02,36.98 U$6.12
N$137  (via drill 0.61)
  Top 0.254: v19.91,37.39 25.2,42.67 25.2,59.33 v43.08,77.22 | v73.36,77.22 78.64,71.93 JP11.14
  Bottom 0.254: v19.91,37.39 18.69,37.39 18.29,36.98 U$14.12 | v43.08,77.22 v73.36,77.22
N$138  (via drill 0.61)
  Top 0.254: v88.19,57.3 85.75,59.74 v85.75,66.85 | v60.15,67.87 56.08,71.93 JP11.5
  Bottom 0.254: v88.19,57.3 89.41,57.3 89.81,56.9 U$5.12 | v85.75,66.85 84.73,67.87 v60.15,67.87
N$139  (via drill 0.61)
  Top 0.254: v21.95,57.1 31.29,66.45 v31.29,66.65
  Bottom 0.254: v21.95,57.1 18.49,57.1 18.29,56.9 U$13.12 | v31.29,66.65 39.42,74.78 73.56,74.78 76.2,72.14 JP11.13
N$140  (via drill 0.61)
  Top 0.254: v90.83,76.2 v104.24,62.79 | v57.51,76.2 53.44,72.14 53.44,71.93 JP11.4
  Bottom 0.254: v104.24,62.79 104.24,39.83 106.68,37.39 107.29,37.39 107.7,36.98 U$4.12 | v57.51,76.2 v90.83,76.2
N$141  (via drill 0.61)
  Top 0.254: v37.8,37.19 36.37,38.61 v36.37,66.45
  Bottom 0.254: v37.8,37.19 36.37,37.19 36.17,36.98 U$12.12 | v36.37,66.45 44.09,74.17 71.32,74.17 73.56,71.93 JP11.12
N$142  (via drill 0.61)
  Top 0.254: v106.07,57.1 103.23,59.94 103.23,62.59 v96.93,68.89 | v54.05,68.89 51,71.93 JP11.3
  Bottom 0.254: v106.07,57.1 107.49,57.1 107.7,56.9 U$3.12 | v54.05,68.89 v96.93,68.89
N$143  (via drill 0.61)
  Top 0.254: v38.41,57.3 39.42,58.32 v39.42,67.67
  Bottom 0.254: v38.41,57.3 36.58,57.3 36.17,56.9 U$11.12 | v39.42,67.67 45.31,73.56 69.7,73.56 71.12,72.14 JP11.11
N$144  (via drill 0.61)
  Top 0.254: v59.33,43.69 63.2,47.55 63.2,64.01 68.48,69.29 68.48,71.73 JP11.10
  Bottom 0.254: v59.33,43.69 58.73,43.69 58.73,40.84 55.27,37.39 54.66,37.39 54.25,36.98 U$10.12
N$145
  Bottom 0.254: U$2.12 125.98,36.98 126.39,37.39 127,37.39 130.45,40.84 130.45,43.69 131.06,43.69 131.67,44.3 131.67,52.22 130.86,52.22 130.45,52.63 130.45,64.01 130.86,64.01 131.47,64.62 131.47,67.67 120.5,67.67 117.65,70.51 49.58,70.51 48.36,71.73 JP11.2
N$146  (via drill 0.61)
  Top 0.254: v123.95,57.3 121.72,59.54 121.72,65.23 v119.48,67.46
  Bottom 0.254: v123.95,57.3 125.37,57.3 125.78,56.9 U$1.12 | v119.48,67.46 117.04,69.9 47.95,69.9 45.92,71.93 JP11.1
N$147  (via drill 0.61)
  Top 0.254: v86.16,54.25 85.14,55.27 85.14,62.59 81.89,65.84 75.18,65.84 | 75.18,65.84 v75.18,51.82 75.18,35.76 v73.76,34.34 82.3,25.81 82.3,23.37 83.11,22.55 v86.56,22.55 | v4.06,34.34 5.49,32.92 5.49,28.04 10.97,22.55 16.26,22.55 v16.26,34.75 v16.26,53.03 16.26,63.4 | v4.47,54.25 5.49,55.27 5.49,57.51 11.38,63.4 16.26,63.4 | v46.53,22.55 45.11,23.98 45.11,26.62 43.08,28.65 JP10.3 43.08,28.85 v43.08,47.95 43.08,63.4 44.09,63.4 | v52.22,54.46 49.17,57.51 49.17,62.59 48.36,63.4 | 44.09,63.4 48.36,63.4 | 16.26,63.4 20.52,67.67 32.72,67.67 32.72,68.07 42.88,78.23 44.09,78.23 44.09,63.4 | v74.57,65.84 75.18,65.84 | v57.71,66.24 48.36,66.24 48.36,63.4
  Bottom 0.254: v73.76,34.34 72.14,34.34 U$8.10 | v75.18,51.82 72.75,54.25 72.14,54.25 U$7.10 | v86.16,54.25 89.81,54.25 U$5.10 | U$1.10 125.98,54.05 127.2,54.05 127.2,52.43 127,52.22 122.94,52.22 122.94,35.36 123.75,34.54 125.58,34.54 U$2.10 126.39,33.73 127,33.73 127.2,33.53 127.2,22.55 102.21,22.55 | 99.57,22.55 99.57,25.4 91.24,33.73 90.42,33.73 90.02,34.14 U$6.10 | 99.57,22.55 102.21,22.55 | 102.21,22.55 109.32,29.67 109.32,34.34 | 109.32,34.34 107.9,34.34 U$4.10 | 109.32,34.34 109.32,39.22 112.78,42.67 113.39,42.67 113.39,49.38 108.92,53.85 108.31,53.85 107.9,54.25 U$3.10 | v86.56,22.55 99.57,22.55 | v16.26,34.75 17.68,34.75 18.09,34.34 U$14.10 | v16.26,53.03 17.27,54.05 18.09,54.05 U$13.10 | v4.06,34.34 2.23,34.34 U$16.10 | v4.47,54.25 2.23,54.25 U$15.10 | U$12.10 36.17,34.34 36.58,33.93 37.39,33.93 42.47,28.85 42.88,28.85 JP10.3 | v43.08,47.95 37.19,53.85 36.58,53.85 36.17,54.25 U$11.10 | v46.53,22.55 49.17,22.55 49.17,30.07 52.83,33.73 53.65,33.73 54.05,34.14 U$10.10 | v52.22,54.46 53.85,54.46 54.05,54.25 U$9.10 | v74.57,65.84 68.07,65.84 67.46,65.23 58.93,65.23 57.91,66.24 v57.71,66.24
N$148  (via drill 0.61)
  Top 0.254: v57.51,57.3 61.77,61.57 61.77,63.4 66.04,67.67 66.04,71.93 JP11.9
  Bottom 0.254: v57.51,57.3 54.66,57.3 54.25,56.9 U$9.12